# Altium PCB PCB5.PcbDoc
Units mm, origin at the board's own origin, x right, y up, seen from the top; angles counter-clockwise.
Board outline 55 x 45 mm, 2 copper layers (Top Layer, Bottom Layer), stack 1.571 mm thick; 64 components, 47 nets, 257 pads, 73 vias.
Unrouted connection lines stored in the file: 15.
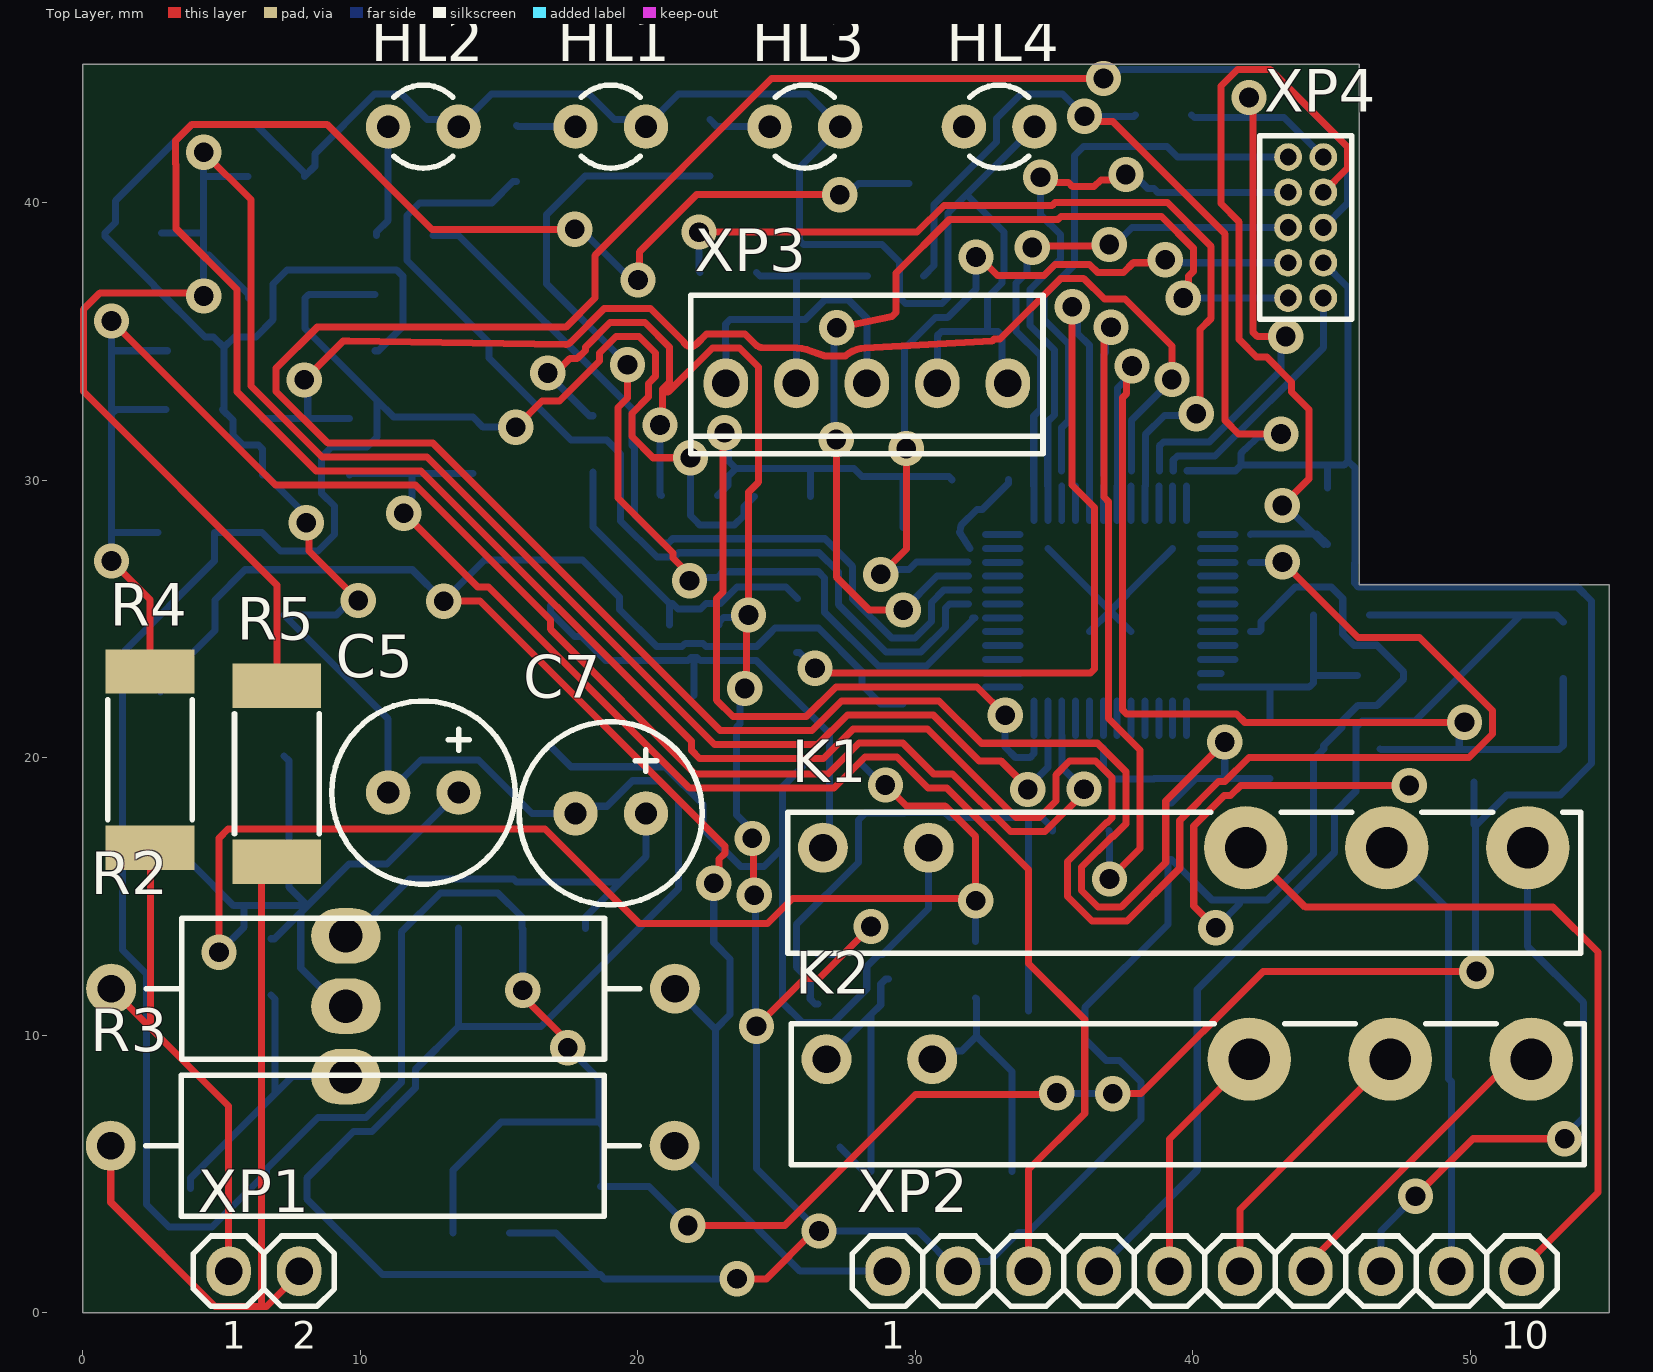
[diagram p0: Top Layer view]
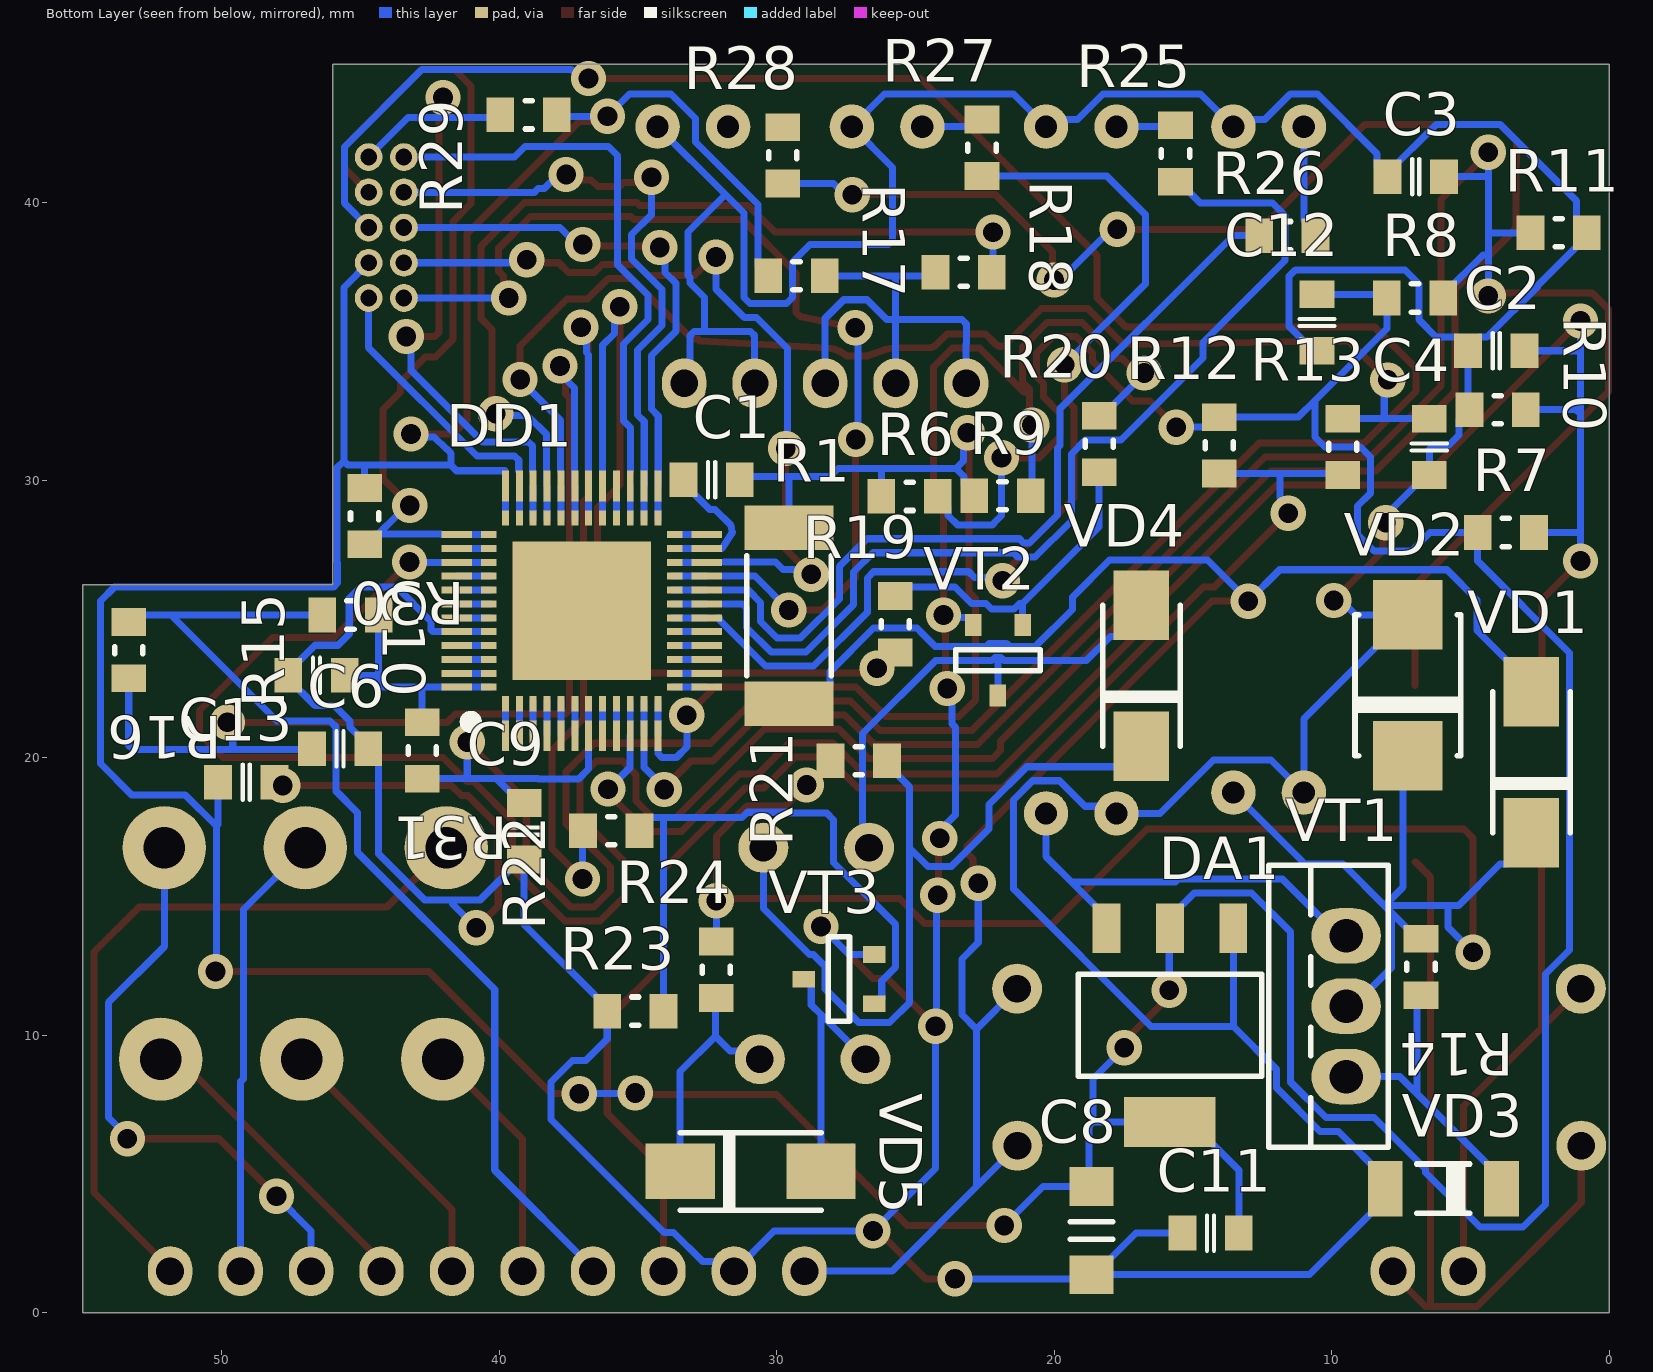
[diagram p1: Bottom Layer view, seen from below]

## Layer stack, top to bottom
Top Solder: solder mask 0.0102, Solder Resist, Dk 3.5
Top Layer: signal copper 0.0356
Dielectric 1: dielectric 1.5, FR-4, Dk 4.8
Bottom Layer: signal copper 0.0356
Bottom Solder: solder mask 0.0102, Solder Resist, Dk 3.5

## Board outline
0,0 0,45 46,45 46,26.25 55,26.25 55,0

## Design rules (kind name [scope] priority, off if disabled: settings)
Clearance [All] p1: gap=0.25 ignorepadtopadclearanceinfootprint=FALSE
PolygonConnect [All] p1: connectstyle=Relief reliefconductorwidth=0.254 reliefentries=4 polygonreliefangle="90 Angle" airgapwidth=0.254
RoutingVias [All] p1: holewidth=0.711 width=1.27 viastyle="Through Hole" minholewidth=0.711 minwidth=1.27 maxholewidth=0.711 maxwidth=1.27
SolderMaskExpansion [All] p1: expansion=0.102 istentingtop=FALSE
Width [All] p1: maxlimit=0.254 minlimit=0.254 preferedwidth=0.254
30 further rules are at their usual default settings.

## Components (designator, comment, footprint, x,y, rotation, side; value= is the part's Value field where it differs from the comment)
C1 "33n" "Cap Ceramic 0805" 33.357,30.025 r180 bottom
C2 "33n" "Cap Ceramic 0805" 5.082,34.675 r180 bottom
C3 "33n" "Cap Ceramic 0805" 7.982,40.95 r180 bottom
C4 "33n" "Cap Ceramic 0805" 6.475,32.225 r270 bottom
C5 "47u" "Cap electro d6.3x2.54mm" 11,18.75 r0 top
C6 "33n" "Cap Ceramic 0805" 46.75,20.325 r180 bottom
C7 "220u" "Cap electro d6.3x2.54mm" 17.75,18 r0 top
C8 "10u" "Cap Ceramic 1206" 18.65,1.375 r90 bottom
C9 "100n" "Cap Ceramic 0805" 39.1,16.343 r90 bottom
C10 "100n" "Cap Ceramic 0805" 47.6,22.975 r180 bottom
C11 "100n" "Cap Ceramic 0805" 15.375,2.875 r180 bottom
C12 "100n" "Cap Ceramic 0805" 10.525,34.675 r90 bottom
C13 "1u" "Cap Ceramic 0805" 48.1,19.125 r0 bottom
DA1 "LM1117IMP-3.3" SOT-232 13.539,13.86 r0 bottom
DD1 "STM32F103CBT6" "TQFP48/QFN48 S0.5" 40.025,20.8 r90 bottom
HL1 "LED" "LED S2.54d3.0" 17.75,42.75 r0 top
HL2 "LED" "LED S2.54d3.0" 11,42.75 r0 top
HL3 "LED" "LED S2.54d3.0" 24.75,42.75 r0 top
HL4 "LED" "LED S2.54d3.0" 31.75,42.75 r0 top
K1 "HF41F/12-ZS" RM699V 21.59,6.604 r180 top
K2 "HF41F/12-ZS" RM699V 21.717,-1.016 r180 top
R1 "30k" "Resistor 2512" 29.55,21.95 r90 bottom
R2 "300R" "Resistor 2W d5.08x20.32 axial" 1.016,11.684 r0 top
R3 "300R" "Resistor 2W d5.08x20.32 axial" 1,6.025 r0 top
R4 "30k" "Resistor 2512" 2.413,16.764 r90 top
R5 "30k" "Resistor 2512" 6.985,16.256 r90 top
R6 "3k6" "Resistor 0805" 24.193,29.425 r0 bottom
R7 "3k6" "Resistor 0805" 4.732,28.125 r180 bottom
R8 "3k6" "Resistor 0805" 8.007,36.575 r180 bottom
R9 "3k6" "Resistor 0805" 20.843,29.45 r0 bottom
R10 "3k6" "Resistor 0805" 5.032,32.55 r180 bottom
R11 "3k6" "Resistor 0805" 0.8,38.925 r0 bottom
R12 "5k1" "Resistor 0805" 14.05,32.282 r270 bottom
R13 "51k" "Resistor 0805" 9.6,30.193 r90 bottom
R14 "10k" "Resistor 0805" 6.775,13.482 r270 bottom
R15 "5k1" "Resistor 0805" 44.343,25.15 r0 bottom
R16 "51k" "Resistor 0805" 53.35,24.9 r270 bottom
R17 "5k1" "Resistor 0805" 30.3,37.375 r180 bottom
R18 "51k" "Resistor 0805" 24.275,37.5 r180 bottom
R19 "1k" "Resistor 0805" 25.725,25.832 r270 bottom
R20 "10k" "Resistor 0805" 18.375,30.3 r90 bottom
R21 "200R" "Resistor 0805" 26.025,19.9 r0 bottom
R22 "1k" "Resistor 0805" 34.943,17.375 r0 bottom
R23 "10k" "Resistor 0805" 34.075,10.875 r0 bottom
R24 "200R" "Resistor 0805" 32.175,11.35 r90 bottom
R25 "1k" "Resistor 0805" 15.625,40.768 r90 bottom
R26 "1k" "Resistor 0805" 12.607,38.825 r180 bottom
R27 "1k" "Resistor 0805" 22.6,40.975 r90 bottom
R28 "1k" "Resistor 0805" 29.775,40.7 r90 bottom
R29 "10k" "Resistor 0805" 37.925,43.175 r0 bottom
R30 "10k" "Resistor 0805" 44.85,29.732 r270 bottom
R31 "10k" "Resistor 0805" 42.775,21.282 r270 bottom
VD1 "S1M" "DO-214AC SMA" 2.8,17.3 r90 bottom
VD2 "SMBJ43CA" "DO-214AA SMB" 7.25,20.075 r90 bottom
VD3 "BZV55C12" SOD80C 3.875,4.475 r0 bottom
VD4 "S1M" "DO-214AC SMA" 16.85,20.42 r90 bottom
VD5 "S1M" "DO-214AC SMA" 33.48,5.1 r180 bottom
VT1 "TIP112" TO-220 9.475,8.51 r90 bottom
VT2 "BC847" SOT-23-3 22.025,22.25 r0 bottom
VT3 "BC847" SOT-23-3 29.025,12.025 r90 bottom
XP1 "ZL211-02KG" "Pins 1x2" 5.25,1.5 r0 top
XP2 "ZL211-10KG" "Pins 1x10" 29,1.5 r0 top
XP3 "NS25-W5P" WF-05 33.33,33.5 r180 top
XP4 "Pins 2x5" "Pins 2x5 - 1.27" 44.704,35.306 r90 top

## Footprints (in the part's own frame and the unit in brackets; to place one, negate y for a bottom-side part, rotate by r counter-clockwise, add the part's x,y. Pads: shape width x height; smd on the part's side, far side on the other; paste and mask are expansions set on the pad)
"Cap Ceramic 0805" [mm]
  rect 1x1.25 smd: 1(0,0) 2(2.032,0)
  silkscreen extent 0.89,-0.64 1.14,0.63
"Cap Ceramic 1206" [mm]
  rect 1.4x1.6 smd: 1(0,0) 2(3.175,0)
  silkscreen extent 1.27,-0.76 1.91,0.76
"Cap electro d6.3x2.54mm" [mm]
  round 1.6 hole 0.8: 1(0,0) 2(2.54,0)
  silkscreen extent -2.03,-3.3 4.57,3.3
"DO-214AA SMB" [mm]
  rect 2.5x2.5 smd: 1(5.08,0) 2(0,0)
  silkscreen extent 0,-1.91 5.08,1.91
"DO-214AC SMA" [mm]
  rect 2.5x2 smd: 1(5.08,0) 2(0,0)
  silkscreen extent 0,-1.4 5.08,1.4
"LED S2.54d3.0" [mm]
  round 1.6 hole 0.8: 1(0,0) 2(2.54,0)
  silkscreen extent 0.21,-1.5 2.33,1.5
"Pins 1x2" [mm]
  oval 1.6x1.8 hole 1: 1(0,0) 2(2.54,0)
  silkscreen extent -1.27,-1.27 3.81,1.27
"Pins 1x10" [mm]
  oval 1.6x1.8 hole 1: 1(0,0) 2(2.54,0) 3(5.08,0) 4(7.62,0) 5(10.16,0) 6(12.7,0) 7(15.24,0) 8(17.78,0) 9(20.32,0) 10(22.86,0)
  silkscreen extent -1.27,-1.27 24.13,1.27
"Pins 2x5 - 1.27" [mm]
  round 1 hole 0.6 unplated: 1(1.27,0) 2(1.27,1.27) 3(2.54,0) 4(2.54,1.27) 5(3.81,0) 6(3.81,1.27) 7(5.08,0) 8(5.08,1.27) 9(6.35,0) 10(6.35,1.27)
  silkscreen extent 0.51,-1.02 7.11,2.29
"Resistor 2W d5.08x20.32 axial" [mm]
  round 1.8 hole 1: 1(0,0) 2(20.32,0)
  silkscreen extent 1.27,-2.54 19.05,2.54
"Resistor 0805" [mm]
  rect 1x1.25 smd: 1(0,0) 2(2.032,0)
  silkscreen extent 0.89,-0.51 1.14,0.51
"Resistor 2512" [mm]
  rect 1.6x3.2 smd: 1(0,0) 2(6.35,0)
  silkscreen extent 1.02,-1.52 5.33,1.52
RM699V [mm]
  round 1.8 hole 1: 1(-5.08,-10.16) 2(-8.89,-10.16)
  round 3 hole 1.5: 11(-25.4,-10.16) 12(-20.32,-10.16) 14(-30.48,-10.16)
  silkscreen extent -32.38,-11.43 -3.81,-6.35
SOD80C [mm]
  rect 1.25x2 smd: 1(4.191,0) 2(0,0)
  silkscreen extent 1.14,-0.89 3.05,0.89
SOT-23-3 [mm]
  rect 0.6x0.8 smd: 1(-0.889,-2.54) 2(0.889,-2.54) 3(0,0)
  silkscreen extent -1.52,-1.65 1.52,-0.89
SOT-232 [mm]
  rect 1x1.8 smd: 1(0,0) 2(2.286,0) 3(4.572,0)
  rect 3.3x1.8 smd: 2(2.286,6.985)
  silkscreen extent -1.02,1.65 5.59,5.33
TO-220 [mm]
  oval 2x2.5 hole 1.2: 1(0,0) 2(2.54,0) 3(5.08,0)
  silkscreen extent -2.54,-1.52 7.62,2.79
"TQFP48/QFN48 S0.5" [mm]
  rect 1.1x0.25 smd: 1(0,-0.25) 2(0,-0.75) 3(0,-1.25) 4(0,-1.75) 5(0,-2.25) 6(0,-2.75) 7(0,-3.25) 8(0,-3.75) 9(0,-4.25) 10(0,-4.75) 11(0,-5.25) 12(0,-5.75) 25(9,-5.75) 26(9,-5.25) 27(9,-4.75) 28(9,-4.25) 29(9,-3.75) 30(9,-3.25) 31(9,-2.75) 32(9,-2.25) 33(9,-1.75) 34(9,-1.25) 35(9,-0.75) 36(9,-0.25)
  rect 0.55x0.25 smd: 1(1.15,-0.25) 2(1.15,-0.75) 3(1.15,-1.25) 4(1.15,-1.75) 5(1.15,-2.25) 6(1.15,-2.75) 7(1.15,-3.25) 8(1.15,-3.75) 9(1.15,-4.25) 10(1.15,-4.75) 11(1.15,-5.25) 12(1.15,-5.75) 25(7.85,-5.75) 26(7.85,-5.25) 27(7.85,-4.75) 28(7.85,-4.25) 29(7.85,-3.75) 30(7.85,-3.25) 31(7.85,-2.75) 32(7.85,-2.25) 33(7.85,-1.75) 34(7.85,-1.25) 35(7.85,-0.75) 36(7.85,-0.25)
  rect 0.25x1.1 smd: 13(1.75,-7.5) 14(2.25,-7.5) 15(2.75,-7.5) 16(3.25,-7.5) 17(3.75,-7.5) 18(4.25,-7.5) 19(4.75,-7.5) 20(5.25,-7.5) 21(5.75,-7.5) 22(6.25,-7.5) 23(6.75,-7.5) 24(7.25,-7.5) 37(7.25,1.5) 38(6.75,1.5) 39(6.25,1.5) 40(5.75,1.5) 41(5.25,1.5) 42(4.75,1.5) 43(4.25,1.5) 44(3.75,1.5) 45(3.25,1.5) 46(2.75,1.5) 47(2.25,1.5) 48(1.75,1.5)
  rect 0.25x0.55 smd: 13(1.75,-6.35) 14(2.25,-6.35) 15(2.75,-6.35) 16(3.25,-6.35) 17(3.75,-6.35) 18(4.25,-6.35) 19(4.75,-6.35) 20(5.25,-6.35) 21(5.75,-6.35) 22(6.25,-6.35) 23(6.75,-6.35) 24(7.25,-6.35) 37(7.25,0.35) 38(6.75,0.35) 39(6.25,0.35) 40(5.75,0.35) 41(5.25,0.35) 42(4.75,0.35) 43(4.25,0.35) 44(3.75,0.35) 45(3.25,0.35) 46(2.75,0.35) 47(2.25,0.35) 48(1.75,0.35)
  rect 2x2 smd: 23(3.25,-4.25) 23(3.25,-1.75) 23(5.75,-4.25) 23(5.75,-1.75)
  rect 5x5 smd paste-100: 23(4.5,-3)
  Top Layer lines w0.25: 1.75,-7.5 1.75,-6.25 ; 2.25,-7.5 2.25,-6.25 ; 2.75,-7.5 2.75,-6.25 ; 3.25,-7.5 3.25,-6.25 ; 3.75,-7.5 3.75,-6.25 ; 4.25,-7.5 4.25,-6.35 4.25,-6.25 ; 4.75,-7.5 4.75,-6.35 4.75,-6.25 ; 5.25,-7.5 5.25,-6.35 5.25,-6.25 ; 5.75,-7.5 5.75,-6.35 5.75,-6.25 ; 6.25,-7.5 6.25,-6.35 6.25,-6.25 ; 6.75,-7.5 6.75,-6.35 6.75,-6.25 ; 7.25,-7.5 7.25,-6.35 7.25,-6.25 ; 0,-5.75 1.15,-5.75 1.25,-5.75 ; 7.75,-5.75 7.85,-5.75 9,-5.75 ; 0,-5.25 1.15,-5.25 1.25,-5.25 ; 7.75,-5.25 7.85,-5.25 9,-5.25 ; 0,-4.75 1.15,-4.75 1.25,-4.75 ; 7.75,-4.75 7.85,-4.75 9,-4.75 ; 0,-4.25 1.15,-4.25 1.25,-4.25 ; 7.75,-4.25 9,-4.25 ; 0,-3.75 1.15,-3.75 1.25,-3.75 ; 7.75,-3.75 7.85,-3.75 9,-3.75 ; 0,-3.25 1.15,-3.25 1.25,-3.25 ; 7.75,-3.25 7.85,-3.25 9,-3.25 ; 0,-2.75 1.25,-2.75 ; 7.75,-2.75 7.85,-2.75 9,-2.75 ; 0,-2.25 1.25,-2.25 ; 7.75,-2.25 7.85,-2.25 9,-2.25 ; 0,-1.75 1.25,-1.75 ; 7.75,-1.75 7.85,-1.75 9,-1.75 ; 0,-1.25 1.25,-1.25 ; 7.75,-1.25 7.85,-1.25 9,-1.25 ; 0,-0.75 1.25,-0.75 ; 7.75,-0.75 7.85,-0.75 9,-0.75 ; 0,-0.25 1.25,-0.25 ; 7.75,-0.25 7.85,-0.25 9,-0.25 ; 1.75,0.25 1.75,0.35 1.75,1.5 ; 2.25,0.25 2.25,0.35 2.25,1 ; 2.75,0.25 2.75,1.5 ; 3.25,0.25 3.25,1.5 ; 3.75,0.25 3.75,0.35 3.75,1.5 ; 4.25,0.25 4.25,1.5 ; 4.75,0.25 4.75,1.5 ; 5.25,0.25 5.25,1.5 ; 5.75,0.25 5.75,1.5 ; 6.25,0.25 6.25,0.35 6.25,1.5 ; 6.75,0.25 6.75,1.5 ; 7.25,0.25 7.25,0.35 7.25,1.5 ; 2.25,1 2.25,1
  silkscreen extent 0.2,0.7 0.8,1.3
WF-05 [mm]
  oval 1.6x1.8 hole 1: 1(0,0) 2(2.54,0) 3(5.08,0) 4(7.62,0) 5(10.16,0)
  silkscreen extent -1.27,-3.17 11.43,2.54

## Part data
C1 C2 C3 C4 C6 C8 C9 C10 C11 C12 C13: library part CerCap
  C8: Comments=10V
C5 C7: library part ECap
  C5: Comments=50V
  C7: Comments=16V
DA1: library part LM1117IMP-x.x
DD1: library part STM32F100C4T6
K1 K2: library part RM699V-xx11-85-xxxx
R1 R4 R5: library part "Resistor 1W", Comments=1%
R2 R3: library part "Resistor 2W", Comments=1%
R6 R7 R8 R9 R10 R11 R12 R13 R14 R15 R16 R17 R18 R19 R20 R21 R22 R23 R24 R25 R26 R27 R28 R29 R30 R31: library part "Resistor 0,125W"
  R6 R7 R8 R9 R10 R11: Comments=1%
  R12 R13 R14 R15 R16 R17 R18 R19 R20 R21 R22 R23 R24 R25 R26 R27 R28 R29 R30 R31: Comments=5%
VD2: library part SMBJxxCA
VD3: library part BZV55Cxx
VT1: library part BDW93C
XP1: library part "Pins 1x2", Name=IA, Name1=CH1, Name2=CH2
XP2: library part "Pins 1x10", Name1=18V, Name2=COM, Name3=LATCH2, Name4=LATCH1, Name5=NC2, Name6=COM2, Name7=NO2, Name8=NO1, Name9=COM1, Name10=NC2
XP3: library part "Pins 1x5", Name=Цепь, Name1=GND, Name2=GND, Name3=SWITCH, Name4=SWITCH, Name5=SWITCH
XP4: Name=PROG

## Via types
v1: diameter 1.27, hole 0.711, Top Layer to Bottom Layer, 73 vias

## Nets (pads, with @x,y where several pads share a name; then routed paths per layer and width w, separated by ;. In a path a pad name is that pad's centre, name@x,y a point inside that pad or via, vN(x,y) a via of type N, cw(c..) or ccw(c..) an arc to the next point about the centre after c; other vN are vias at no path point)
3V3: C8.2 C10.2 C11.2 C12.2 C13.2 DA1.2 DD1.9 DD1.24 DD1.36 DD1.48 R6.1 R7.1 R8.1 R12.1 R15.1 R17.1 R29.1 R30.1 R31.1 XP4.3 | length 229.6
  Top Layer w0.254: v1(15.601,31.92) 16.544,32.863 17.169,32.863 18.611,34.305 18.611,34.592 19.204,35.185 20.042,35.185 20.635,34.592 20.635,33.754 20.378,33.497 20.378,33.017 19.781,32.419 19.781,31.581 20.544,30.818 v1(21.894,30.818) ; v1(15.85,11.625) 15.85,11.4 17.475,9.775 v1(17.475,9.55) ; v1(21.8,3.15) 25.294,3.15 30.011,7.867 35.034,7.867 v1(35.092,7.925) ; v1(36.1,43.125) 36.293,42.932 37.116,42.932 41.167,38.881 41.167,32.158 41.65,31.675 v1(43.175,31.675) ; v1(37.116,7.9) 38.139,7.9 42.539,12.3 v1(50.225,12.3)
  Bottom Layer w0.254: C12.2 8.139,36.707 R8.1 8.007,35.476 10.602,32.881 ; C11.2 13.343,5.143 15.075,6.875 15.825,6.875 18.601,6.875 ; v1(15.601,31.92) 14.412,31.92 R12.1 11.201,32.282 10.602,32.881 ; v1(15.85,11.625) 15.85,13.835 15.825,13.86 15.825,14.26 14.948,15.137 12.883,15.137 11.473,13.727 11.473,8.31 10.206,7.043 8.476,7.043 6.611,5.178 6.611,5.053 4.656,3.098 3.094,3.098 2.293,3.899 2.293,12.213 1.423,13.083 1.423,23.786 4.732,27.095 R7.1 6.456,28.125 7.118,27.463 8.469,27.463 9.062,28.056 9.062,29.073 8.598,29.537 8.598,30.849 8.958,31.209 10.242,31.209 10.602,31.569 10.602,32.881 ; v1(17.475,9.55) 18.601,8.424 18.601,6.875 ; v1(21.8,3.15) 20.4,4.55 C8.2 18.75,4.65 18.75,6.726 18.601,6.875 ; v1(21.894,30.818) 21.894,28.731 22.075,28.55 22.077,28.55 22.225,28.402 23.486,28.402 23.82,28.737 23.82,29.052 R6.1 ; R17.1 30.673,37.748 30.673,39.94 32.927,42.194 32.927,43.052 33.802,43.927 35.298,43.927 v1(36.1,43.125) 37.875,43.125 R29.1 ; v1(35.092,7.925) 35.104,7.913 37.103,7.913 v1(37.116,7.9) ; 39.799,30.35 41.535,30.35 41.735,30.55 ; DD1.48@41.525,22.55 42.86,22.55 ; R31.1 42.775,22.465 42.86,22.55 ; v1(43.175,31.675) 43.072,31.572 42.349,31.572 41.904,31.127 41.883,31.127 41.735,30.979 41.735,30.55 ; R15.1 44.343,23.048 ; XP4.3 45.599,36.951 45.599,30.699 ; R30.1 44.85,30.544 44.856,30.55 ; C10.2@45.943,22.975 44.416,22.975 44.343,23.048 ; C13.2 50.132,17.602 50.193,17.541 ; v1(50.225,12.3) 50.193,12.332 50.193,17.541 ; 41.735,30.55 44.856,30.55 ; 42.86,22.55 44.194,22.55 44.343,22.699 44.343,23.048 ; 44.856,30.55 45.45,30.55 45.599,30.699 ; 45.599,30.699 45.852,30.445 45.852,27.044 45.825,27.017 45.825,26.301 45.974,26.152 53.874,26.152 54.375,25.651 54.375,19.8 53.246,18.671 51.322,18.671 50.193,17.541
12V: C7.2 DA1.3 VT1.3 | length 15.8
  Bottom Layer w0.254: VT1.3 9.725,13.59 11.776,15.641 15.516,15.641 15.634,15.523 19.374,15.523 ; DA1.3 18.111,14.26 19.374,15.523 ; C7.2 20.29,16.439 19.374,15.523
C_K1: K1.11 XP2.9 | length 16.2
  Bottom Layer w0.254: K1.11 49.213,14.541 49.213,8.435 49.32,8.328 XP2.9
C_K2: K2.11 XP2.6 | length 9.9
  Top Layer w0.254: XP2.6 41.7,3.727 K2.11
CH1_ADC_MCU: C2.2 DD1.10 R4.2 R7.2 R10.2 | length 65.7
  Top Layer w0.254: v1(1.025,27.1) 2.413,25.712 R4.2 ; v1(1.025,35.75) 6.942,29.833 11.979,29.833 16.848,24.964 16.848,24.639 22.061,19.426 26.857,19.426 27.97,20.54 29.547,20.54 30.661,19.426 31.341,19.426 33.422,17.345 34.678,17.345 36.074,18.741 v1(36.074,18.875)
  Bottom Layer w0.254: v1(1.025,27.1) 1.025,28.167 ; v1(1.025,35.75) 1.025,34.729 ; R7.2 1.067,28.125 1.025,28.167 ; R10.2 1.181,32.55 1.025,32.394 ; C2.2 1.079,34.675 1.025,34.729 ; DD1.10@35.277,20.8 35.277,19.664 36.066,18.875 v1(36.074,18.875) ; 1.025,28.167 1.025,32.394 ; 1.025,32.394 1.025,34.729
CH2_ADC_MCU: C3.2 DD1.11 R5.2 R8.2 R11.2 | length 77.7
  Top Layer w0.254: v1(4.35,36.65) 4.238,36.762 0.606,36.762 0.013,36.169 0.013,33.21 6.985,26.238 R5.2 ; v1(4.35,41.825) 6.05,40.125 6.05,33.406 8.615,30.841 12.397,30.841 22.759,20.479 26.484,20.479 27.553,21.548 30.645,21.548 32.297,19.896 33.079,19.896 34.05,18.925 v1(34.05,18.861)
  Bottom Layer w0.254: R11.2 4.272,38.925 4.35,39.003 ; v1(4.35,36.65) 4.35,38.131 ; v1(4.35,41.825) 4.389,41.786 4.389,41.51 4.35,41.472 4.35,40.923 ; C3.2 4.377,40.95 4.35,40.923 ; R8.2 5.975,36.7 4.544,38.131 4.35,38.131 ; v1(34.05,18.861) 34.05,18.925 34.773,19.648 34.773,20.189 ; 34.775,20.25 DD1.11@34.775,20.45 ; 4.35,38.131 4.35,39.003 ; 4.35,39.003 4.35,40.923
Gnd: C1.1 C2.1 C3.1 C4.2 C5.1 C6.2 C7.1 C8.1 C9.1 C10.1 C11.1 C12.1 C13.1 DA1.1 DD1.8 DD1.23 DD1.35 DD1.44 DD1.47 HL1.2 HL2.2 HL3.2 HL4.2 R9.1 R10.1 R11.1 R20.2 R23.2 VD2.1 VD3.1 VT2.2 VT3.2 XP2.2 XP3.1 XP3.2 XP4.1 | length 311.4
  Top Layer w0.254: v1(8.05,28.475) 8.141,28.384 8.141,27.459 v1(9.925,25.675) ; v1(16.75,33.875) 17.025,33.875 17.545,34.395 17.812,34.395 18.107,34.69 18.107,34.801 18.995,35.689 20.251,35.689 21.139,34.801 21.139,33.545 20.882,33.288 20.882,33.187 ; v1(20.793,32) 20.882,32.089 20.882,33.187 ; v1(23.575,1.225) 24.625,1.225 26.35,2.95 v1(26.525,2.95) ; v1(23.847,22.499) 23.916,22.568 23.916,25.08 v1(23.985,25.149) 23.985,29.575 24.347,29.937 24.347,34.088 23.658,34.777 22.682,34.777 21.093,33.187 20.882,33.187 ; v1(24.125,17.1) 24.158,17.066 24.158,15.084 v1(24.192,15.05) ; v1(24.275,10.325) 26.006,12.056 26.531,12.056 v1(28.4,13.925) ; v1(40.825,13.875) 40.033,14.667 40.033,17.541 41.133,18.641 41.36,18.641 41.726,19.007 v1(47.801,19.007)
  Bottom Layer w0.254: v1(8.05,28.475) 8.05,28.743 6.6,30.193 C4.2 6.475,31.126 6.326,31.275 5.767,31.275 5.405,31.637 5.405,32.177 R10.1 5.082,32.6 C2.1 C2.1@5.082,34.8 ; v1(9.925,25.675) 9.65,25.675 9.13,25.155 VD2.1 11,21.405 C5.1 12.177,19.927 14.256,19.927 16.183,18 C7.1 18.008,18.258 18.883,18.258 19.802,19.177 20.778,19.177 21.467,18.488 21.467,15.283 16.507,10.323 13.539,10.323 ; C12.1 10.65,34.675 11.527,35.552 11.527,37.363 11.306,37.584 7.358,37.584 6.852,37.078 6.852,35.794 6.231,35.173 5.455,35.173 C2.1@5.082,34.8 ; DA1.1 13.539,10.323 ; C11.1 17.05,2.875 C8.1@18.55,1.375 ; v1(16.75,33.875) 16.75,33.832 18.25,32.332 R20.2 ; v1(20.793,32) 20.793,29.5 R9.1 ; VT2.2 22.914,24.89 23.087,25.063 23.899,25.063 v1(23.985,25.149) ; v1(23.575,1.225) 18.8,1.225 C8.1 C8.1@18.55,1.375 ; v1(23.847,22.499) 23.677,22.329 23.677,21.231 23.55,21.104 23.55,17.95 24.125,17.375 v1(24.125,17.1) ; v1(24.192,15.05) 24.233,15.008 24.233,10.367 v1(24.275,10.325) 24.275,5.2 v1(26.525,2.95) 30.09,2.95 XP2.2 31.898,1.858 32.673,1.858 33.716,2.901 34.064,2.901 38.128,6.965 38.128,8.319 37.353,9.094 36.879,9.094 36.104,9.869 36.104,10.872 R23.2 36.107,11 39.1,13.993 C9.1 39.225,16.343 40.681,14.887 41.684,14.887 ; VT3.2 27.389,12.914 v1(28.4,13.925) ; XP3.2 30.79,35.216 30.939,35.365 32.599,35.365 ; 31.975,27.55 31.598,28.133 31.65,28.375 31.65,28.383 32.222,28.955 32.412,28.955 33.357,29.9 C1.1 ; XP3.1 33.123,33.707 33.123,35.216 32.975,35.365 32.599,35.365 ; DD1.23@33.675,27.55 DD1.23@33.775,27.55 ; HL4.2 31.849,40.309 ; DD1.23@34.775,27.55 35.775,26.55 DD1.23@37.025,25.3 ; DD1.8@36.275,21.95 DD1.8@36.275,22.05 ; DD1.23@36.275,24.55 DD1.23@37.025,25.3 ; DD1.23@37.775,24.55 DD1.23@37.025,25.3 ; DD1.23@39.275,27.55 38.275,26.55 DD1.23@37.025,25.3 ; 39.295,30.35 39.295,30.735 39.444,30.884 40.803,30.884 44.704,34.785 XP4.1 ; DD1.44@40.275,24.55 DD1.44@40.375,24.55 ; v1(40.825,13.875) 41.684,14.734 41.684,14.887 ; 42.075,24.55 42.4,24.55 ; 42.454,24.607 42.454,24.919 43.687,26.152 44.999,26.152 45.403,25.748 45.403,24.464 45.807,24.06 46.64,24.06 47.6,23.1 C10.1 47.6,22.85 46.646,21.896 45.95,21.896 45.369,21.315 45.369,21.101 44.718,20.45 C6.2 44.345,19.952 44.345,16.545 42.687,14.887 41.684,14.887 ; v1(47.801,19.007) 47.918,19.125 C13.1 ; C2.1@5.082,34.8 4.709,35.173 4.396,35.173 2.552,37.017 2.552,37.048 0.8,38.8 R11.1 1.173,39.298 1.173,40.079 3.931,42.837 6.22,42.837 7.982,41.075 C3.1 8.355,41.323 8.355,41.77 10.512,43.927 11.488,43.927 12.407,43.008 13.282,43.008 HL2.2 14.717,43.927 18.238,43.927 19.157,43.008 20.032,43.008 HL1.2 21.467,43.927 26.113,43.927 HL3.2 25.825,41.285 25.825,38.649 25.974,38.5 28.801,38.5 29.423,37.878 29.423,36.594 29.644,36.373 30.956,36.373 31.177,36.594 31.177,39.637 31.849,40.309 ; 13.539,10.323 11.977,8.761 11.977,8.102 10.415,6.539 9.755,6.539 8.066,4.85 8.066,4.1 10.791,1.375 C8.1@18.55,1.375 ; 31.849,40.309 33.201,38.956 33.201,37.393 33.123,37.316 33.123,37.115 32.599,36.591 32.599,35.365
GPIO_PB12: DD1.25 XP4.6 | length 18.8
  Top Layer w0.254: v1(34.213,38.4) 34.264,38.451 36.94,38.451 v1(36.991,38.502)
  Bottom Layer w0.254: v1(34.213,38.4) 34.019,38.206 34.019,37.498 33.627,37.107 33.627,35.378 34.507,34.499 34.507,32.569 34.267,32.329 DD1.25@34.267,29.8 ; v1(36.991,38.502) 37.199,38.502 37.814,39.116 XP4.6
GPIO_PB13: DD1.26 XP4.8 | length 21.8
  Top Layer w0.254: v1(34.513,40.928) 34.707,40.734 35.515,40.734 35.656,40.593 36.444,40.593 36.686,40.835 37.393,40.835 v1(37.587,41.03)
  Bottom Layer w0.254: v1(34.513,40.928) 34.513,39.576 35.225,38.864 35.225,37.981 34.131,36.887 34.131,35.587 35.011,34.707 35.011,32.36 34.771,32.12 DD1.26@34.771,29.8 ; v1(37.587,41.03) 37.862,41.03 38.374,40.518 38.598,40.518 38.73,40.386 XP4.8
GPIO_PB14: DD1.27 XP4.10 | length 20.3
  Bottom Layer w0.254: 35.275,30.35 35.275,31.911 35.515,32.151 35.515,34.916 34.635,35.796 34.635,36.678 35.729,37.772 35.729,41.711 36.059,42.042 39.064,42.042 39.45,41.656 XP4.10
K1_MCU: DD1.29 R19.2 | length 31.2
  Top Layer w0.254: v1(26.384,23.235) 26.559,23.06 36.31,23.06 36.458,23.209 36.458,29.024 35.647,29.835 35.647,36.259 v1(35.653,36.265)
  Bottom Layer w0.254: R19.2 25.819,23.8 v1(26.384,23.235) ; v1(35.653,36.265) 35.842,36.076 35.842,35.302 36.271,34.873 DD1.29@36.271,29.8
K2_MCU: DD1.30 R22.2 | length 28.1
  Top Layer w0.254: v1(37,15.638) 38.094,16.732 38.094,20.283 36.962,21.415 36.962,29.232 36.793,29.402 36.793,34.993 37.047,35.247 v1(37.047,35.522)
  Bottom Layer w0.254: DD1.30@36.775,30.223 36.775,34.528 36.853,34.606 36.853,35.328 v1(37.047,35.522) ; R22.2 37,17.35 v1(37,15.638)
KIP1: R15.2 R16.1 XP2.4 | length 38.1
  Bottom Layer w0.254: XP2.4 36.62,1.6 40.16,5.14 40.16,11.647 45.113,16.6 45.113,18.038 45.873,18.798 45.873,21.106 46.094,21.327 48.002,21.327 51.825,25.15 ; R15.2 51.825,25.15 ; R16.1 53.1,25.15 51.825,25.15
KIP1_DI_MCU: C6.1 DD1.31 R16.2 | length 39.7
  Top Layer w0.254: v1(37.805,34.127) 37.617,33.939 37.617,33.133 37.466,32.982 37.466,21.736 37.615,21.587 41.569,21.587 41.872,21.284 v1(49.791,21.284)
  Bottom Layer w0.254: DD1.31@37.279,29.8 37.279,33.326 37.805,33.852 v1(37.805,34.127) ; C6.1 46.775,20.3 49.602,20.3 ; v1(49.791,21.284) 49.602,21.096 49.602,20.3 ; R16.2 53.35,20.453 53.197,20.3 49.602,20.3
KIP2: R12.2 R13.1 XP2.3 | length 50.9
  Top Layer w0.254: v1(11.56,28.821) 14.227,26.154 14.62,26.154 21.852,18.922 27.065,18.922 28.179,20.036 29.338,20.036 30.452,18.922 31.132,18.922 34.08,15.974 34.08,12.591 36.104,10.567 36.104,7.184 34.08,5.16 XP2.3
  Bottom Layer w0.254: R13.1 9.657,30.25 11.854,30.25 ; v1(11.56,28.821) 11.56,29.096 11.854,29.389 11.854,30.25 ; R12.2 11.854,30.25
KIP2_DI_MCU: C4.1 DD1.32 R13.2 | length 45.1
  Top Layer w0.254: v1(7.975,33.625) 9.295,34.945 9.369,35.019 9.579,35.019 17.391,34.902 17.393,34.902 ccw(c17.395,35.156) 17.603,35.01 18.786,36.193 20.46,36.193 21.643,35.01 21.652,34.989 ccw(c21.886,35.088) 21.881,34.835 21.918,34.834 ccw(c21.921,35.088) 22.101,34.908 22.474,35.281 23.866,35.281 24.277,34.87 ; 24.278,34.869 ccw(c24.457,35.05) 24.452,34.796 ; 24.453,34.796 25.728,34.777 cw(c25.71,33.6) 26.094,34.713 26.744,34.488 27.478,34.488 cw(c28.25,33.6) 28.187,34.775 32.763,35.019 32.837,35.093 33.05,35.093 35.239,37.282 36.067,37.282 36.815,36.534 37.558,36.534 39.245,34.847 v1(39.245,33.639)
  Bottom Layer w0.254: C4.1@6.525,32.175 C4.1 8.1,32.225 ; v1(7.975,33.625) 8.1,33.5 8.1,32.225 ; R13.2 8.1,32.225 ; 37.783,30.35 37.783,32.167 39.245,33.629 v1(39.245,33.639)
LED1: DD1.19 R25.1 | length 35.8
  Bottom Layer w0.254: R25.1 15.5,40.768 14.733,40.001 12.124,40.001 11.675,39.551 11.675,37.928 14.634,34.969 14.634,34.414 17.594,31.455 18.878,31.455 19.377,30.956 19.377,28.545 20.682,27.24 21.31,27.24 21.464,27.394 26.533,27.394 27.231,26.697 27.231,25.521 28.939,23.814 30.195,23.814 31.083,24.702 31.083,25.397 31.231,25.546 31.908,25.546
LED2: DD1.20 R26.1 | length 29.5
  Bottom Layer w0.254: R26.1 13.54,38.825 19.781,32.584 19.781,31.265 19.881,31.165 19.881,28.754 20.891,27.744 21.101,27.744 21.256,27.898 26.742,27.898 27.735,26.906 27.735,25.73 29.147,24.318 29.986,24.318 30.579,24.91 30.579,25.606 31.023,26.05 31.929,26.05
LED3: DD1.18 R27.1 | length 35.3
  Top Layer w0.254: v1(19.623,34.173) 19.623,32.975 19.277,32.628 19.277,29.373 21.267,27.383 21.267,27.203 21.859,26.612 v1(21.859,26.382)
  Bottom Layer w0.254: v1(19.623,34.173) 16.713,37.083 16.713,39.588 18.1,40.975 R27.1 ; v1(21.859,26.382) 21.983,26.507 22.875,26.507 23.077,26.709 26.506,26.709 26.727,26.488 26.727,25.248 28.665,23.31 30.403,23.31 DD1.18@32.059,24.966 ; DD1.18@32.059,25.05 DD1.18@32.144,25.05
LED4: DD1.39 R28.1 | length 117.8
  Top Layer w0.254: v1(17.725,39.05) 12.584,39.05 8.797,42.837 3.931,42.837 3.338,42.244 3.338,41.406 3.359,41.384 3.359,39.072 5.546,36.885 5.546,33.197 8.406,30.337 12.188,30.337 21.925,20.6 21.925,20.275 22.225,19.975 26.693,19.975 27.762,21.044 30.436,21.044 33.631,17.849 34.469,17.849 35.062,18.442 35.062,19.392 35.557,19.887 36.493,19.887 37.086,19.294 37.086,17.836 36.925,17.675 36.887,17.675 35.484,16.272 35.484,15.01 36.372,14.122 37.628,14.122 39.529,16.023 39.529,17.75 40.924,19.145 41.151,19.145 42.025,20.019 49.956,20.019 50.803,20.865 50.803,21.704 48.167,24.339 45.952,24.339 v1(43.234,27.057) ; v1(20,37.225) 20.06,37.285 20.06,38.241 22.119,40.3 v1(27.275,40.3)
  Bottom Layer w0.254: v1(17.725,39.05) 17.95,39.05 19.775,37.225 v1(20,37.225) ; v1(27.275,40.3) 27.55,40.3 27.95,40.7 R28.1 ; 42.075,27.05 43.227,27.05 v1(43.234,27.057)
NC_K1: K1.12 XP2.10 | length 26.9
  Top Layer w0.254: K1.12 44.054,14.62 52.981,14.62 54.6,13.001 54.6,4.34 51.86,1.6 XP2.10
NC_K2: K2.12 XP2.5 | length 8.8
  Top Layer w0.254: XP2.5 39.16,6.267 K2.12
NetHL1_1: HL1.1 R25.2 | length 2.1
  Bottom Layer w0.254: R25.2 15.675,42.75 HL1.1
NetHL2_1: HL2.1 R26.2 | length 4.1
  Bottom Layer w0.254: R26.2 10.575,38.95 11,39.375 HL2.1
NetHL3_1: HL3.1 R27.2 | length 2.3
  Bottom Layer w0.254: R27.2 22.857,42.75 HL3.1
NetHL4_1: HL4.1 R28.2
NetK1_1: K1.1 VD4.1 VT2.3 | length 17.8
  Bottom Layer w0.254: VD4.1 16.85,25.25 17.723,24.377 17.973,24.377 18.841,23.509 21.801,23.509 21.917,23.625 21.919,23.625 ; VT2.3 22.025,23.519 21.919,23.625 ; K1.1 26.902,16.996 26.902,20.875 24.266,23.511 23.428,23.511 23.426,23.509 22.249,23.509 22.133,23.625 22.025,23.625 21.919,23.625
NetK1_2: K1.2 R21.1 VD4.2 | length 29.8
  Bottom Layer w0.254: VD4.2 17.589,19.681 20.986,19.681 22.346,18.321 22.346,17.448 23.706,16.088 24.544,16.088 25.137,16.681 ; R21.1 26.025,19.775 25.204,18.954 25.204,16.681 25.204,11.184 25.929,10.459 27.041,10.459 28.248,11.666 28.248,12.481 28.68,12.913 28.819,12.913 30.48,14.574 K1.2
NetK2_1: K2.1 VD5.1 VT3.3 | length 11
  Bottom Layer w0.254: K2.1 28.4,10.747 ; VD5.1@27.277,5.973 28.15,5.1 VD5.1 28.4,10.747 ; VT3.3 28.925,12.025 28.752,11.852 28.752,11.099 28.4,10.747
NetK2_2: K2.2 R24.1 VD5.2 | length 8.7
  Bottom Layer w0.254: K2.2 30.903,9.44 31.672,9.44 32.202,9.97 ; R24.1 32.202,11.323 32.202,9.97 ; VD5.2 33.48,8.692 32.202,9.97
NetR2_1: R2.1 R4.1 XP1.1 | length 18.4
  Top Layer w0.254: R2.1 2.436,10.264 ; R4.1 2.436,16.741 2.436,10.264 ; XP1.1 5.25,7.45 2.436,10.264
NetR3_1: R3.1 R5.1 XP1.2 | length 27.2
  Top Layer w0.254: R3.1 1,3.985 4.762,0.223 6.406,0.223 ; R5.1 6.427,15.698 6.427,0.244 6.406,0.223 ; XP1.2 7.79,1.4 6.613,0.223 6.406,0.223
NetR14_2: R14.2 VD3.2 VT1.1 | length 11.1
  Bottom Layer w0.254: VD3.2 3.875,4.85 6.919,7.894 ; R14.2 6.919,11.306 6.919,7.894 ; VT1.1 7.535,8.51 6.919,7.894
NetR17_2: R17.2 R18.1 XP3.3 XP3.4 XP3.5 | length 18.2
  Bottom Layer w0.254: XP3.5 23.17,34.919 23.155,34.933 23.155,35.63 23.325,35.8 25.713,35.8 ; R18.1 24.4,37.375 25.713,37.375 25.827,37.375 ; XP3.4 25.71,35.797 25.713,35.8 ; XP3.3 28.25,35.845 27.583,36.512 26.744,36.512 26.032,35.8 25.713,35.8 ; R17.2 25.827,37.375 ; 25.713,35.8 25.713,37.262 25.827,37.375
NetR19_1: R19.1 R20.1 VT2.1 | length 11.8
  Bottom Layer w0.254: R20.1 18.375,28.328 21.136,25.567 ; VT2.1 21.136,25.567 ; R19.1@25.75,25.75 25.339,26.161 23.566,26.161 22.972,25.567 22.458,25.567 22.261,25.37 21.439,25.37 21.243,25.567 21.136,25.567
NetR22_1: R22.1 R23.1 VT3.1 | length 22.4
  Bottom Layer w0.254: VT3.1 26.385,11.136 26.212,11.309 26.212,11.954 25.708,12.458 25.708,13.996 27.947,16.235 27.947,17.764 28.194,18.012 29.609,18.012 29.639,18.041 31.053,18.041 31.245,17.849 34.075,17.849 ; R23.1 34.075,17.849 ; R22.1 34.943,17.476 34.57,17.849 34.075,17.849
NO_K1: K1.14 XP2.8 | length 21
  Top Layer w0.254: v1(48.025,4.2) 50.1,6.275 v1(53.4,6.275)
  Bottom Layer w0.254: XP2.8 46.78,2.955 v1(48.025,4.2) ; K1.14 52.07,13.196 54.074,11.192 54.074,7.038 53.4,6.364 v1(53.4,6.275)
NO_K2: K2.14 XP2.7 | length 11.3
  Top Layer w0.254: XP2.7 44.24,1.846 51.538,9.144 K2.14
RST: C9.2 DD1.7 R31.2 XP4.5 | length 110.2
  Top Layer w0.254: v1(36.783,44.483) 24.819,44.483 18.45,38.115 18.45,36.569 17.404,35.523 8.442,35.523 6.963,34.044 6.963,33.206 8.824,31.345 12.606,31.345 22.968,20.983 26.275,20.983 27.344,22.052 30.854,22.052 32.377,20.528 36.565,20.528 37.59,19.503 37.59,17.627 37.134,17.171 37.096,17.171 35.988,16.063 35.988,15.219 36.581,14.626 37.419,14.626 39.025,16.232 39.025,18.45 v1(41.15,20.575)
  Bottom Layer w0.254: DD1.7@36.775,20.35 36.775,19.605 37.134,19.246 38.6,19.246 38.604,19.25 40.1,19.25 ; v1(36.783,44.483) 37.057,44.483 37.386,44.812 42.788,44.812 45.581,42.019 45.581,39.993 XP4.5 ; C9.2 39.225,18.375 40.1,19.25 ; v1(41.15,20.575) 41.15,19.306 41.094,19.25 ; R31.2 41.094,19.25 ; 40.1,19.25 41.094,19.25
SW_DI_MCU: DD1.33 R18.2 | length 31.3
  Top Layer w0.254: v1(22.2,38.95) 30.062,38.95 31.028,39.916 34.932,39.916 35.034,40.018 39.082,40.018 40.663,38.437 40.663,35.844 40.257,35.438 40.257,32.532 v1(40.125,32.4)
  Bottom Layer w0.254: v1(22.2,38.95) 22.2,37.543 R18.2 ; DD1.33@38.287,29.8 38.287,31.651 38.982,32.346 40.071,32.346 v1(40.125,32.4)
SWCLK: DD1.37 R30.2 XP4.7 | length 30
  Top Layer w0.254: v1(43.225,29.1) 44.187,30.062 44.187,32.559 43.558,33.188 43.558,33.553 42.665,34.446 42.3,34.446 41.671,35.075 41.671,39.318 41.013,39.976 41.013,44.219 41.606,44.812 42.788,44.812 45.067,42.533 45.581,42.019 45.581,41.263 XP4.7
  Bottom Layer w0.254: 42.075,28.052 42.092,28.069 44.481,28.069 R30.2 ; v1(43.225,29.1) 43.325,29.1 R30.2@44.725,27.7
SWDIO: DD1.34 R29.2 XP4.9 | length 23.6
  Top Layer w0.254: v1(42.025,43.8) 42.175,43.65 42.175,35.34 42.324,35.191 v1(43.352,35.192)
  Bottom Layer w0.254: 38.791,30.35 38.791,31.239 38.94,31.388 40.594,31.388 43.177,33.971 43.177,35.017 v1(43.352,35.192) ; R29.2 40.057,43.075 42.013,43.075 ; v1(42.025,43.8) 42.013,43.788 42.013,43.075 ; XP4.9 43.285,43.075 42.013,43.075
USART3_RX: DD1.22 XP4.4 | length 28.5
  Top Layer w0.254: v1(28.755,26.615) 29.675,27.535 v1(29.675,31.15) ; v1(32.189,38.05) 32.302,38.05 32.964,37.388 34.632,37.388 35.03,37.786 36.275,37.786 36.572,37.49 37.497,37.49 37.854,37.846 38.899,37.846 v1(39.004,37.952)
  Bottom Layer w0.254: v1(28.755,26.615) 28.928,26.787 29.771,26.787 30.042,27.058 31.889,27.058 ; v1(29.675,31.15) 29.613,31.212 29.613,34.752 30.73,35.869 31.165,35.869 32.189,36.893 v1(32.189,38.05) ; v1(39.004,37.952) 39.11,37.846 XP4.4
USART3_TX: DD1.21 XP4.2 | length 36.2
  Top Layer w0.254: v1(27.15,31.475) 27.15,26.519 28.337,25.332 29.564,25.332 v1(29.567,25.33) ; v1(27.164,35.5) 29.156,35.903 29.305,36.052 29.305,37.48 31.237,39.412 35.141,39.412 35.242,39.514 38.874,39.514 40.016,38.371 40.016,37.532 39.845,37.361 39.845,36.77 v1(39.651,36.576)
  Bottom Layer w0.254: v1(27.15,31.475) 27.073,31.552 27.073,35.41 v1(27.164,35.5) ; v1(29.567,25.33) 29.567,25.342 30.778,26.554 31.908,26.554 ; v1(39.651,36.576) XP4.2
VCC: R1.1 R2.2 R3.2 VD1.1 XP2.1 | length 72.1
  Top Layer w0.254: v1(13,25.65) 14.305,25.65 23.139,16.816 23.139,16.562 22.928,16.352 22.928,15.674 v1(22.734,15.479)
  Bottom Layer w0.254: VD1.1 2.8,22.63 4.758,24.588 4.758,25.697 5.844,26.782 11.868,26.782 v1(13,25.65) 14.477,27.127 18.006,27.127 19.343,25.79 19.343,25.35 20.68,24.013 21.592,24.013 21.708,24.129 22.342,24.129 22.458,24.013 23.37,24.013 23.372,24.015 24.283,24.015 24.723,24.455 ; R3.2 22.798,4.547 ; R2.2 22.798,10.222 ; v1(22.734,15.479) 22.734,13.347 23.325,12.756 23.325,10.749 22.798,10.222 ; 24.723,24.456 24.944,24.677 26.506,24.677 28.077,23.106 28.077,22.623 28.75,21.95 R1.1 ; XP2.1 25.845,1.5 22.798,4.547 ; 22.798,4.547 22.798,10.222
VCC_ADC_MCU: C1.2 DD1.12 R1.2 R6.2 R9.2 | length 37.4
  Top Layer w0.254: v1(23.12,31.716) 23.062,31.657 23.062,25.977 22.835,25.75 22.835,22.08 23.428,21.487 26.067,21.487 27.135,22.556 32.226,22.556 v1(33.242,21.54)
  Bottom Layer w0.254: R9.2 23.248,29.823 23.248,30.138 23.537,30.427 ; v1(23.12,31.716) 23.264,31.572 23.264,30.7 23.537,30.427 ; R6.2 26.225,30.349 26.303,30.427 ; R1.2 29.55,30.138 ; C1.2 31.212,30.138 29.55,30.138 ; v1(33.242,21.54) 33.228,21.526 33.228,20.397 33.618,20.007 34.126,20.007 34.275,20.156 DD1.12@34.275,20.377 ; 23.537,30.427 26.303,30.427 ; 26.303,30.427 27.782,30.427 28.071,30.138 29.55,30.138
VCC_R: C5.2 R14.1 R21.2 R24.2 VD1.2 VD2.2 VT1.2 | length 69.9
  Top Layer w0.254: v1(4.9,13) 4.9,17.104 5.229,17.433 16.652,17.433 20.047,14.038 24.677,14.038 25.576,14.937 32.088,14.937 v1(32.175,14.85) 32.175,17.167 31.075,18.266 29.677,18.266 v1(28.919,19.024)
  Bottom Layer w0.254: VD1.2 2.8,17.05 3.673,16.177 3.923,16.177 5.427,14.673 5.81,14.673 ; v1(4.9,13) 5.81,13.91 5.81,14.673 ; R14.1 6.9,13.482 7.848,14.43 ; VD2.2 7.425,19.9 7.425,15.34 8.091,14.673 ; VT1.2 9.225,11.05 7.848,12.427 7.848,14.43 ; C5.2 10.964,16.174 9.592,16.174 8.091,14.673 ; R21.2 28.057,19.775 28.808,19.024 v1(28.919,19.024) ; R24.2 v1(32.175,14.85) ; 5.81,14.673 8.091,14.673 ; 7.848,14.43 8.091,14.673
pads on no net: DD1.1 DD1.2 DD1.3 DD1.4 DD1.5 DD1.6 DD1.13 DD1.14 DD1.15 DD1.16 DD1.17 DD1.28 DD1.38 DD1.40 DD1.41 DD1.42 DD1.43 DD1.45 DD1.46

## Silkscreen, mask and mechanical layers (free items; w line width, h text height)
Mechanical 1:
  the board outline again, w0.2

## Text inside footprints (layer, text, board x,y; h text height)
XP1: Top Overlay "1" at 4.996,-1.294 h1; Top Overlay "2" at 7.536,-1.294 h1
XP2: Top Overlay "1" at 28.746,-1.294 h1; Top Overlay "10" at 51.098,-1.294 h1